# Altium PCB ADSR PCB.PcbDoc
Units mm, origin at the board's own origin, x right, y up, seen from the top; angles counter-clockwise.
Board outline 36 x 100 mm, 2 copper layers (Top Layer, Bottom Layer), stack 1.571 mm thick; 39 components, 30 nets, 107 pads, 18 vias.
Unrouted connection lines stored in the file: 1.
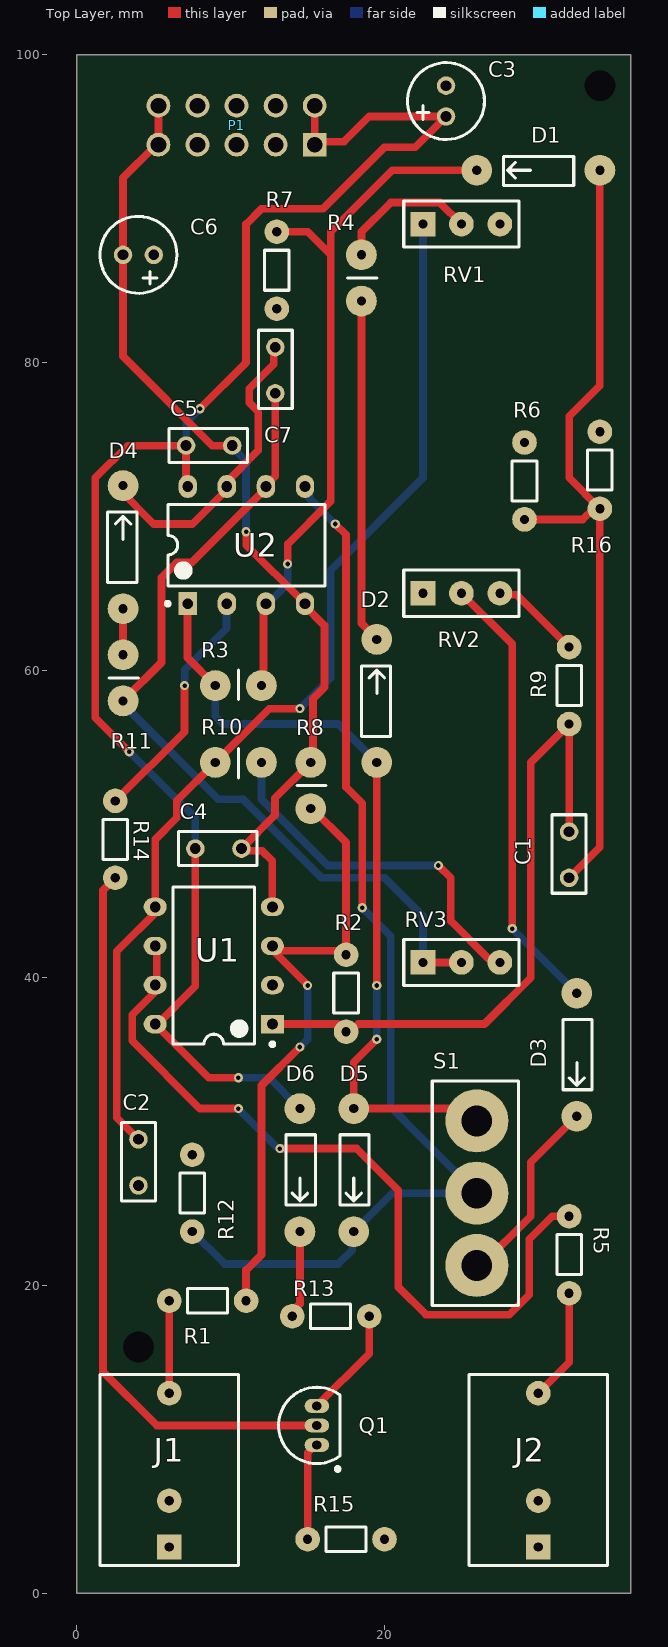
[diagram p0: Top Layer view]
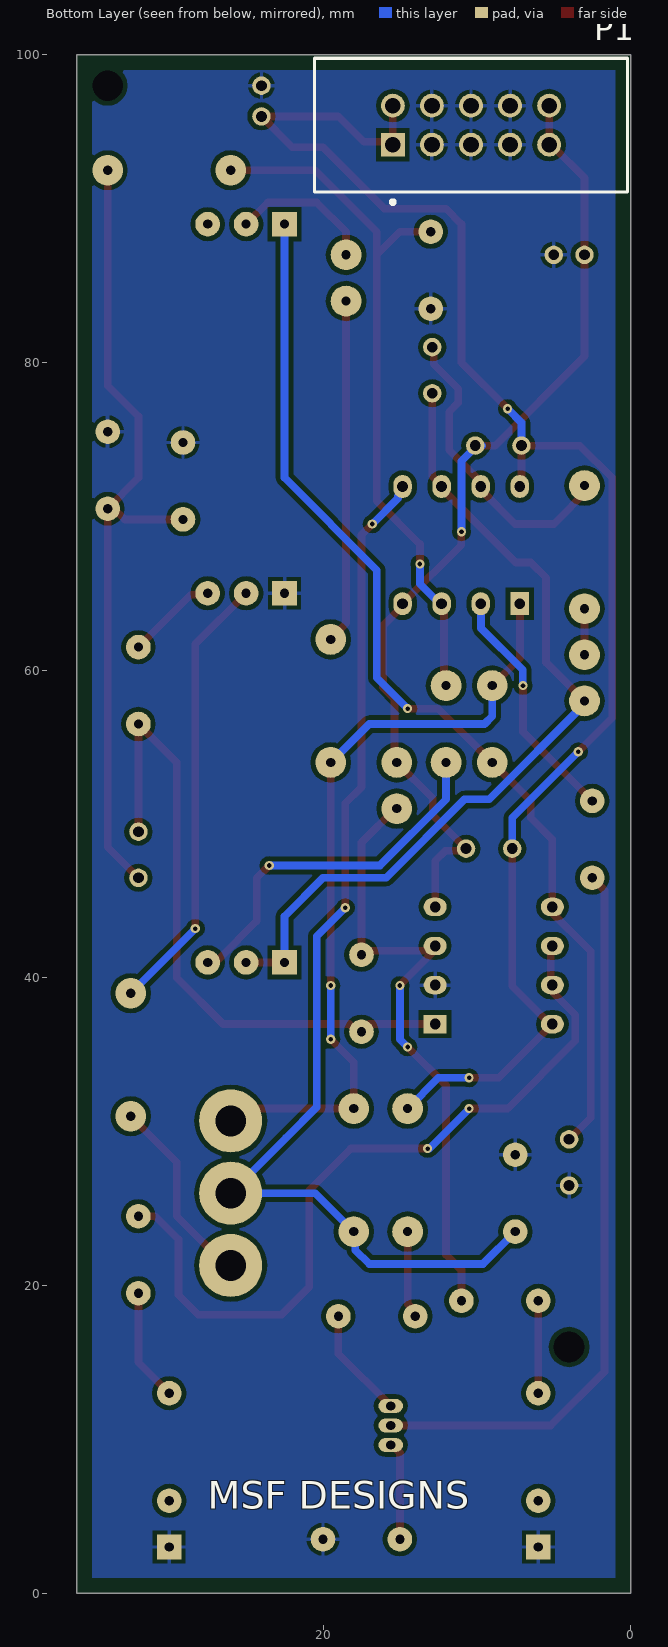
[diagram p1: Bottom Layer view, seen from below]

## Layer stack, top to bottom
Top Solder: solder mask 0.0102, Solder Resist, Dk 3.5
Top Layer: signal copper 0.0356
Dielectric 1: dielectric 1.5, FR-4, Dk 4.8
Bottom Layer: signal copper 0.0356
Bottom Solder: solder mask 0.0102, Solder Resist, Dk 3.5

## Board outline
0,100 36,100 36,0 0,0

## Design rules (kind name [scope] priority, off if disabled: settings)
Clearance [All] p1: gap=0.3 ignorepadtopadclearanceinfootprint=FALSE
PolygonConnect [All] p1: connectstyle=Relief reliefconductorwidth=0.254 reliefentries=4 polygonreliefangle="90 Angle" airgapwidth=0.254
RoutingVias [All] p1: holewidth=0.3 width=0.6 viastyle="Through Hole" minholewidth=0.3 minwidth=0.6 maxholewidth=0.3 maxwidth=0.6
SilkToSilkClearance [All] p1 off: silktosilkclearance=0.254
SilkToSolderMaskClearance [IsPad] p1: minsilkscreentomaskgap=0.1 clearancetoexposedcopper=TRUE
SolderMaskExpansion [All] p1: expansion=0.102 istentingtop=FALSE
Width [All] p1: maxlimit=1 minlimit=0.3 preferedwidth=0.5
28 further rules are at their usual default settings.

## Components (designator, comment, footprint, x,y, rotation, side; value= is the part's Value field where it differs from the comment)
C1 "Cap" CERAMIC_CAP 32,49.5 r270 top value=1n
C2 "Cap" CERAMIC_CAP 4,29.5 r270 top value=1u
C3 "Cap Pol1" ELECTROLYTIC_CAP 24,96 r90 top value=10u
C4 "Cap" CERAMIC_CAP 7.7,48.4 r0 top value=100n
C5 "Cap" CERAMIC_CAP 7.1,74.6 r0 top value=100n
C6 "Cap Pol1" ELECTROLYTIC_CAP 5,87 r180 top value=10u
C7 "Cap" CERAMIC_CAP 12.9,81 r270 top value=10n
D1 "Diode" DIODE 34,92.5 r180 top
D2 "4148" DIODE 19.5,54 r90 top
D3 "4148" DIODE 32.5,39 r270 top
D4 "4148" DIODE 3,64 r90 top
D5 "4148" DIODE 18,31.5 r270 top
D6 "LED" DIODE 14.5,31.5 r270 top
J1 "Mono Jack" MONO_JACK 6,3 r180 top
J2 "Mono Jack" MONO_JACK 30,3 r180 top
P1 "1-1634688-0" TECO-1-1634688-0-10_V 10.38,95.43 r180 top
Q1 "2N3904" TO-92A 15.6,10.9 r0 top
R1 "Res1" "RES_Axial 5mm" 6,19 r0 top value=10k
R2 "Res1" "RES_Axial 5mm" 17.5,41.5 r270 top value=1M
R3 "Res1" R_SMT 9,59 r0 top value=100K
R4 "Res1" R_SMT 18.5,87 r270 top value=1K
R5 "Res1" "RES_Axial 5mm" 32,24.5 r270 top value=1K
R6 "Res1" "RES_Axial 5mm" 29.1,69.8 r90 top value=1M
R7 "Res1" "RES_Axial 5mm" 13,83.5 r90 top value=220k
R8 "Res1" R_SMT 15.2,54 r270 top value=100k
R9 "Res1" "RES_Axial 5mm" 32,56.5 r90 top value=22K
R10 "Res1" R_SMT 12,54 r180 top value=1K
R11 "Res1" R_SMT 3,61 r270 top value=1K
R12 "Res1" "RES_Axial 5mm" 7.5,23.5 r90 top value=1M
R13 "Res1" "RES_Axial 5mm" 14,18 r0 top value=4.7K
R14 "Res1" "RES_Axial 5mm" 2.5,46.5 r90 top value=10K
R15 "Res1" "RES_Axial 5mm" 15,3.5 r0 top value=2.2K
R16 "Res1" "RES_Axial 5mm" 34,70.5 r90 top value=1M
RV1 "RPot" POT 22.5,89 r90 top value=1M
RV2 "RPot" POT 22.5,65 r90 top value=100k
RV3 "RPot" POT 22.5,41 r90 top value=1M
S1 "SW-SPDT" SWITCH 26,26 r180 top
U1 "TL072ACP" P0008A 8.9,40.8 r180 top
U2 "TL072ACP" P0008A 11.019,68.131 r90 top

## Footprints (in the part's own frame and the unit in brackets; to place one, negate y for a bottom-side part, rotate by r counter-clockwise, add the part's x,y. Pads: shape width x height; smd on the part's side, far side on the other; paste and mask are expansions set on the pad)
CERAMIC_CAP [mm]
  round 1.2 hole 0.7: 1(0,0) 2(3,0)
  silkscreen extent -1.1,-1.1 4,1.1
DIODE [mm]
  round 2 hole 0.6: 1(0,0) 2(8,0)
  silkscreen extent 1.7,-0.9 6.28,1
ELECTROLYTIC_CAP [mm]
  round 1.2 hole 0.7: 1(0,0) 2(2,0)
  silkscreen extent -1.5,-2.5 3.5,2.5
MONO_JACK [mm]
  rect 1.6x1.6 hole 0.6: 1(0,0)
  round 1.6 hole 0.6: 2(0,-3) 3(0,-10)
  silkscreen extent -4.5,-11.2 4.5,1.2
P0008A [mm] "DIP, 8-Leads, Body 10.15x6.6mm, Pitch 2.54mm"
  rect 1.5x1.2 hole 0.7: 1(-3.81,3.81)
  oval 1.5x1.2 hole 0.7: 2(-3.81,1.27) 3(-3.81,-1.27) 4(-3.81,-3.81) 5(3.81,-3.81) 6(3.81,-1.27) 7(3.81,1.27) 8(3.81,3.81)
  silkscreen extent -3.94,-5.1 2.65,5.23, body extent -3.95,-5.07 3.95,5.07, height 5.08
POT [mm]
  rect 1.6x1.6 hole 0.6: 1(0,0)
  round 1.6 hole 0.6: 2(0,-5) 3(0,-2.5)
  silkscreen extent -1.5,-6.25 1.5,1.25
R_SMT [mm]
  round 2 hole 0.6: 1(0,0) 2(3,0)
  silkscreen extent 1.5,-0.9 1.5,1
"RES_Axial 5mm" [mm]
  round 1.6 hole 0.6: 1(0,0) 2(5,0)
  silkscreen extent 1.2,-0.8 3.8,0.8
SWITCH [mm]
  round 4.1 / inner round 4 / far side round 4.1 hole 2: 1(0,4.7) 2(0,0) 3(0,-4.7)
  silkscreen extent -2.7,-7.3 2.9,7.3
TECO-1-1634688-0-10_V [mm] "10-Pin Connector, Body 20.35x8.7mm, Pitch 2.54mm"
  rect 1.55x1.55 hole 1.02: 1(-5.08,1.27)
  round 1.55 hole 1.02: 2(-5.08,-1.27) 3(-2.54,1.27) 4(-2.54,-1.27) 5(0,1.27) 6(0,-1.27) 7(2.54,1.27) 8(2.54,-1.27) 9(5.08,1.27) 10(5.08,-1.27)
  body extent -10.17,-4.65 10.18,4.35, height 9
TO-92A [mm] "TO, Flat Index; 3 In-Line, Axial Leads; Body Dia. 4.5mm; Leads 0.51 x 0.48 mm (max)"
  oval 1.6x0.9 hole 0.6: 1(0,-1.27) 2(0,0) 3(0,1.27)
  silkscreen extent -2.48,-2.95 1.5,2.48, body extent -2.48,-2.5 1.5,2.5, height 6.86

## Part data
C1 C2 C4 C5 C7: "Capacitor", LatestRevisionDate=17-Jul-2002, LatestRevisionNote="Re-released for DXP Platform.", PackageDescription="Radial Cap, Thru-Hole; 2 Leads; 0.3 in Pin Spacing", PackageReference=RAD-0.3, Published=8-Jun-2000, Publisher="Altium Limited"
C3 C6: "Polarized Capacitor (Radial)", LatestRevisionDate=17-Jul-2002, LatestRevisionNote="Re-released for DXP Platform.", PackageDescription="Polarized Capacitor (Radial); 2 Leads", PackageReference=RB7.6-15, Published=8-Jun-2000, Publisher="Altium Limited"
D1: "Default Diode", Code_JEDEC=DO-214-AB, LatestRevisionDate=17-Jul-2002, LatestRevisionNote="Re-released for DXP Platform.", PackageDescription="DO-214-AB/SMC; 2 C-Bend Leads; Body 7.9 x 5.9 mm, inc. leads (LxW)", PackageReference=SMC, PackageVersion=Sep-1996, Published=8-Jun-2000, Publisher="Altium Limited"
D2 D3 D4 D5: library part Diode, "Default Diode", Code_JEDEC=DO-214-AB, LatestRevisionDate=17-Jul-2002, LatestRevisionNote="Re-released for DXP Platform.", PackageDescription="DO-214-AB/SMC; 2 C-Bend Leads; Body 7.9 x 5.9 mm, inc. leads (LxW)", PackageReference=SMC, PackageVersion=Sep-1996, Published=8-Jun-2000, Publisher="Altium Limited"
D6: library part LED0, "Typical INFRARED GaAs LED", LatestRevisionDate=08-Jul-2005, LatestRevisionNote="Mech Layer 1 removed.", PackageDescription="LED; 2 Leads", PackageReference=LED-0, Published=8-Jun-2000, Publisher="Altium Limited"
J1 J2: library part 4832.2211, "Phone Connectors Audio Socket 3.5MM 2P SCR", Case/Package=Metal, Current Rating=500mA, Manufacturer=Schurter, Max Operating Temperature=70°C, Max Voltage Rating (AC)=30V, Min Operating Temperature=-20°C, Package Quantity=500, Supplier Part Number 1=486-3418-ND, Body Material=Metal, Category="Audio / Video Connectors", ComponentLink1Description=https://datasheet.ciiva.com/25289/1580985-25289573.pdf?src-supplier=Newark, ComponentLink1URL=https://datasheet.ciiva.com/25289/1580985-25289573.pdf?src-supplier=Newark, ComponentLink2Description=https://datasheet.ciiva.com/12540/typ-4832-2211-58787-12540719.pdf?src-supplier=Mouser, ComponentLink2URL=https://datasheet.ciiva.com/12540/typ-4832-2211-58787-12540719.pdf?src-supplier=Mouser, ComponentLink3Description=https://datasheet.ciiva.com/1086/1580985-1086284.pdf?src-supplier=Element14, ComponentLink3URL=https://datasheet.ciiva.com/1086/1580985-1086284.pdf?src-supplier=Element14, Contact Plating=Silver, Depth=9mm, Diameter=3.5mm, Gender=Female, Length=10.5mm, Manufacturer Part Number=4832.2211, Material=Plastic, Max Current Rating=500mA, Mount="Through Hole,Panel", Number of Contacts=2, Number of Ports=1, Number of Terminals=3, Orientation=Straight, Packaging=Bulk, Pricing 1="1=1.50000, 50=1.38500, 100=1.13400, 500=0.94200, 1000=0.93840 (USD)", REACH SVHC="No SVHC", RoHS=Yes, Shielding=Shielded, Stock 1=363, Supplier 1=Digi-Key, Termination=Solder, Weight=0.077603oz
P1: library part CMP-2000-05854-1, "Male Header, Pitch 2.54 mm, 2 x 5 Postion, Height 9.15 mm, Tail Length 3.2 mm, -40 to 105 degC, RoHS, Bulk", Manufacturer="TE Connectivity", Package Description="10-Pin Connector, Body 20.35 x 8.7 mm, Pitch 2.54 mm", Package Version="Rev. C2, 02/2011", Contact Material=Brass, Contact Plating=GoldPlatedContacts, Contact Termination Type=ThroughHole, Datasheet URL=https://datasheet.ciiva.com/6831/eng-cd-1634688-c2-6831201.pdf, Datasheet Version="Rev. C2, 02/2011", Gender=Header, Manufacturer URL=http://www.te.com/, Mounting Technology=ThroughHole, No. of Contacts=10Contacts, No. of Positions=10, No. of Rows=2, Orientation=Straight, Package Reference=1-1634688-0, Package URL=https://datasheet.ciiva.com/6831/eng-cd-1634688-c2-6831201.pdf, PartNumber=1-1634688-0, Pitch=2.54mm, Pitch Spacing=2.54mm, Product Range=-, SVHC=ToBeAdvised
Q1: "NPN General Purpose Amplifier", ComponentLink1Description="Manufacturer Link", ComponentLink1URL=http://www.fairchildsemi.com/, ComponentLink2Description=Datasheet, ComponentLink2URL=http://www.fairchildsemi.com/ds/2N%2F2N3904.pdf, DatasheetVersion=1997, LatestRevisionDate=15-Jan-2003, LatestRevisionNote="PCB Footprint 'BCY-W3/D4.7' replaced", PackageDescription="TO, Flat Index; 3 In-Line, Axial Leads; Body Dia. 4.5mm; Leads 0.51 x 0.48 mm (max)", PackageReference=TO-92A, PackageVersion=Sep-1998, Published=8-Jun-2000, Publisher="Altium Limited"
R1 R2 R3 R4 R5 R6 R7 R8 R9 R10 R11 R12 R13 R14 R15 R16: "Resistor", LatestRevisionDate=17-Jul-2002, LatestRevisionNote="Re-released for DXP Platform.", PackageDescription="Axial Device, Thru-Hole; 2 Leads; 0.3 in Pin Spacing", PackageReference=AXIAL-0.3, Published=8-Jun-2000, Publisher="Altium Limited"
RV1 RV2 RV3: "Potentiometer", LatestRevisionDate=17-Jul-2002, LatestRevisionNote="Re-released for DXP Platform.", PackageDescription="Variable Resistor, Thru-Hole; 3 Leads", PackageReference=VR5, Published=8-Jun-2000, Publisher="Altium Limited", Set Position=0.5, Sim Note="Enter the Resistance value and the set point into parameter fields."
S1: "SPDT Subminiature Toggle Switch, Right Angle Mounting, Vertical Actuation", ComponentLink1Description="Manufacturer Link", ComponentLink1URL=http://www.apem.com, DatasheetVersion=05-Dec-2000, LatestRevisionDate=17-Dec-2003, LatestRevisionNote="Schematic revised, PCB Footprint replaced.", PackageDescription="Switch; 4 Leads", PackageReference=TL36WW15050, Published=24-Mar-1999, Publisher="Altium Limited"
U1 U2: library part CMP-0017-00929-2, "Low-Noise JFET-Input Operational Amplifier, 7 to 36 V, 0 to 70 degC, 8-pin DIP (P8), Pb-Free (RoHS)", Manufacturer="Texas Instruments", Rating=Catalog, Total Supply Voltage(Max)(+5V is 5, +/-5V is 10)=36, Total Supply Voltage(Min)(+5V is 5, +/-5V is 10)=7, CMRR(Min)(dB)=75, Code_JEDEC=MS-001, ComponentLink1Description="Manufacturer URL", ComponentLink1URL=http://www.ti.com/, ComponentLink2Description=Datasheet, ComponentLink2URL=http://www.ti.com/lit/ds/symlink/tl072a.pdf, ComponentLink3Description="Package Specification", ComponentLink3URL=http://www.ti.com/litv/pdf/mpdi001b, DatasheetVersion=SLOS080J, Eco-Plan="Pb-Free (RoHS)", GBW(Typ)(MHz)=3, IIB(Max)(pA)=200, Iq per channel(Max)(mA)=2.5, Mounting Technology="Through Hole", Number of Channels=2, Offset Drift(Typ)(uV/C)=18, PackageDescription="8-Pin Plastic In-Line, Body 9.59 x 6.35 mm, Pitch 2.54 mm", PackageReference=P0008A, PackageVersion="4040082/E, 04/2010", PartNumber=TL072ACP, Slew Rate(Typ)(V/us)=13, Sub Family="General Purpose Amplifier, High Supply Voltage Amplifier (>=30V)", Vio (25C)(Max)(mV)=6, Vn at 1kHz(Typ)(nV/rtHz)=18

## Free pads (board coordinates)
  round 0 hole 2 unplated: 2(34,98) 3(4,16)

## Via types
v1: diameter 0.6, hole 0.3, Top Layer to Bottom Layer, 18 vias

## Nets (pads, with @x,y where several pads share a name; then routed paths per layer and width w, separated by ;. In a path a pad name is that pad's centre, name@x,y a point inside that pad or via, vN(x,y) a via of type N, cw(c..) or ccw(c..) an arc to the next point about the centre after c; other vN are vias at no path point)
+12V: C3.1 C4.1 C5.1 D6.1 P1.1 P1.2 U1.8 U2.8 | length 104.3
  Top Layer w0.5: v1(3.4,54.7) 1.2,56.9 1.2,72.5 3.3,74.6 C5.1 7.095,74.595 U2.8@7.095,71.915 ; C4.1 7.7,39.45 5.24,36.99 U1.8 8.58,33.5 v1(10.5,33.5) ; v1(8,77) 11,80 11,89 12,90 16,90 20,94 22,94 C3.1 19,96 17.361,94.361 15.661,94.361 P1.1 P1.2
  Bottom Layer w0.5: v1(3.4,54.7) 7.7,50.4 C4.1 ; C5.1 7.1,76.1 v1(8,77) ; v1(10.5,33.5) 12.5,33.5 D6.1
"+12V IC1": 
"+12V IC2": 
-12V: C4.2 C5.2 C6.2 P1.9 P1.10 R8.1 U1.4 U2.4 | length 63.1
  Top Layer w0.5: C6.2@3,86.8 3,80.4 8.8,74.6 C5.2 ; C6.2 3,92 P1.9@5,94 ; P1.9 P1.10 ; v1(11,69) 11.019,68.981 11.019,68.131 14.71,64.44 U2.4@14.71,64.29 ; U1.4 12.7,44.62 12.7,47.6 12.034,48.266 10.834,48.266 C4.2 12.873,50.573 12.873,51.673 R8.1 15.35,54.15 15.35,58.153 16.1,58.903 16.1,62.9 14.754,64.246 14.754,64.321 U2.4
  Bottom Layer w0.5: C5.2@9.648,74.6 C5.2 10.1,74.491 11,73.591 v1(11,69)
"-12V IC1": 
"-12V IC2": 
GND: C2.2 C3.2 C6.1 J1.1 J2.1 P1.3 P1.4 P1.5 P1.6 P1.7 P1.8 R6.2 R7.1 R12.2 R15.2 R16.2 RV2.1 U1.2 | length 1.3
  Top Layer w0.5: J1.1 J1.1@6.057,2.943 ; J2.1@29.5,2.5 J2.1
  Bottom Layer w0.5: U1.2@12.81,39.23 13.001,39.421 U1.2@13.001,39.692
NetC1_1: C1.1 R2.2 R9.1 U1.1 | length 42.4
  Top Layer w0.5: U1.1 12.72,37 17,37 R2.2 ; R2.2@18.008,36.71 18.298,37 26.5,37 29.5,40 29.5,54 R9.1 C1.1
NetC1_2: C1.2 D1.1 R6.1 R16.1 | length 53.7
  Top Layer w0.5: R6.1 32.894,69.8 33.594,70.5 R16.1 ; C1.2 34,48.5 R16.1 ; D1.1 34,78.5 32,76.5 32,72.5 R16.1
NetC2_1: C2.1 R10.2 RV1.1 U1.5 | length 69.4
  Top Layer w0.5: C2.1 2.6,30.9 2.6,41.72 U1.5@5.29,44.41 ; U1.5 5.09,48.99 6.5,50.4 6.5,51.5 R10.2 12.5,57.5 v1(14.5,57.5)
  Bottom Layer w0.5: v1(14.5,57.5) 16.5,59.5 16.5,66.5 22.5,72.5 RV1.1
NetC7_1: C7.1 D4.2 U2.7 | length 19.9
  Top Layer w0.5: D4.2@2.75,71.75 5,69.5 7.5,69.5 9.73,71.73 U2.7@9.73,71.81 ; U2.7@9.63,71.91 9.63,72.13 11.8,74.3 11.8,76.8 11.2,77.4 11.2,78.3 12.8,79.9 12.8,80.9 C7.1
NetC7_2: C7.2 R11.2 RV3.1 RV3.3 U2.6 | length 55.6
  Top Layer w0.5: R11.2 5.5,60.5 5.5,66 6.5,67 7.46,67 12.27,71.81 12.27,71.973 12.9,72.603 C7.2 ; RV3.1 RV3.3
  Bottom Layer w0.5: R11.2 3,57.8 9.2,51.6 10.8,51.6 15.9,46.5 20,46.5 22.5,44 RV3.1
NetD1_2: D1.2 R3.2 R7.2 U2.3 | length 46.6
  Top Layer w0.5: R3.2 12.135,59.135 12.135,64.055 U2.3@12.27,64.19 ; R7.2 15,88.5 16.5,87 ; v1(13.7,66.9) 13.7,68.2 16.5,71 16.5,87 ; D1.2 20.5,92.5 16.5,88.5 16.5,87
  Bottom Layer w0.5: U2.3@12.27,64.19 13.7,65.62 v1(13.7,66.9)
NetD2_1: D2.1 D5.1 R3.1 S1.3 U2.1 | length 50.5
  Top Layer w0.5: U2.1@7.19,64.19 7.19,60.81 R3.1 ; v1(19.5,36) 18,34.5 v1(18,31.5) 25.2,31.5 S1.3@25.4,31.7 ; v1(19.5,39.5) D2.1
  Bottom Layer w0.5: R3.1@9.119,58.881 R3.1 9,57 9.5,56.5 17,56.5 D2.1 ; v1(19.5,36) v1(19.5,39.5)
NetD2_2: D2.2 R4.2 | length 22.4
  Top Layer w0.5: R4.2@18.5,84.023 18.5,63.043 19.5,62.043 D2.2
NetD3_1: D3.1 RV2.3 | length 29.1
  Top Layer w0.5: RV2.3 28.3,61.7 v1(28.3,43.2)
  Bottom Layer w0.5: v1(28.3,43.2) D3.1
NetD3_2: D3.2 S1.1 | length 12.6
  Top Layer w0.5: S1.1 26.3,21.3 29.5,24.5 29.5,28 D3.2
NetD4_1: D4.1 R11.1 | length 3
  Top Layer w0.5: R11.1 D4.1
NetD6_2: D6.2 R13.1 | length 5.6
  Top Layer w0.5: R13.1@14.5,18.125 14.21,18.415 14.21,18.508 14.5,18.798 D6.2
NetJ1_3: J1.3 R1.1 | length 6
  Top Layer w0.5: J1.3 R1.1
NetJ2_3: J2.3 R5.2 | length 7.3
  Top Layer w0.5: J2.3 32,15 R5.2
NetQ1_1: Q1.1 R15.1 | length 6.5
  Top Layer w0.5: R15.1 15,9.112 15.173,9.285 15.173,9.445 15.358,9.63 Q1.1
NetQ1_2: Q1.2 R14.1 | length 47.8
  Top Layer w0.5: R14.1 1.7,45.7 1.7,14.4 5.2,10.9 Q1.2
NetQ1_3: Q1.3 R13.2 | length 7.2
  Top Layer w0.5: Q1.3 19,15.57 R13.2
NetR1_2: R1.2 R2.1 R8.2 U1.3 | length 40.7
  Top Layer w0.5: R1.2 11,21 12,22 12,33 v1(14.5,35.5) ; R8.2@14.6,51.4 R8.2@14.6,51.5 ; v1(15,39.5) 15,39.527 12.81,41.717 12.81,41.77 17.23,41.77 R2.1 17.5,48.8 15.3,51 R8.2
  Bottom Layer w0.5: v1(14.5,35.5) 15,36 v1(15,39.5)
NetR4_1: R4.1 RV1.2 RV1.3 | length 9.4
  Top Layer w0.5: R4.1 18.5,88.5 20.4,90.4 23.6,90.4 RV1.3@25.018,88.982
NetR5_1: R5.1 U1.6 U1.7 | length 50.8
  Top Layer w0.5: U1.6@5.19,41.77 5.19,39.19 3.6,37.6 3.6,35.9 8,31.5 v1(10.5,31.5) ; v1(13.2,28.9) 18.2,28.9 20.9,26.2 20.9,19.9 22.7,18.1 28.1,18.1 29.4,19.4 29.4,23 30.9,24.5 R5.1
  Bottom Layer w0.5: v1(10.5,31.5) 13.1,28.9 v1(13.2,28.9)
NetR9_2: R9.2 RV2.2 | length 5.9
  Top Layer w0.5: RV2.2 27.596,64.904 28.596,64.904 R9.2
NetR10_1: R10.1 RV3.2 | length 23.9
  Top Layer w0.5: v1(23.5,47.3) 24.3,46.5 24.3,43.7 26.79,41.21 27.29,41.21 RV3.2
  Bottom Layer w0.5: R10.1 12,51.6 16.3,47.3 v1(23.5,47.3)
NetR14_2: R14.2 U2.2 | length 16
  Top Layer w0.5: R14.2 7,56 v1(7,59) ; U2.2@9.558,64.13 U2.2
  Bottom Layer w0.5: v1(7,59) 7.019,59.019 7.019,60.019 9.73,62.73 U2.2@9.73,64.19
pads on no net: D5.2 J1.2 J2.2 R12.1 S1.2 U2.5
copper on no net: | length 72.5
  Top Layer w0.5: v1(16.8,69.5) 17.5,68.8 17.5,52.4 18.55,51.35 v1(18.55,44.55)
  Bottom Layer w0.5: 7.5,23.5 9.6,21.4 17,21.4 17.9,22.3 17.9,23.4 18,23.5 20.5,26 26,26 22.4,29.6 20.4,31.6 20.4,42.7 v1(18.55,44.55) ; 14.829,71.941 14.829,71.601 15.124,71.307 15.124,71.176 v1(16.8,69.5)

## Polygon pours and split planes (outlines as drawn)
GND on Bottom Layer "GND_L02_P013" (solid, remove dead copper, pour order 13): 1,1 35,1 35,99 1,99
GND on Bottom Layer "GND_L02_P011" (solid, remove dead copper, pour order 11): -6,97
no net on Bottom Layer "NONET_L02_P007" (solid, pour order 7): -6,89
GND on Bottom Layer "GND_L02_P005" (solid, pour order 5): 2.65,6.625
GND on Bottom Layer "GND_L02_P000" (solid, pour order 0): -34.7,6.4
no net on Top Layer "NONET_L01_P012" (solid, remove dead copper, pour order 12): 1,1

## Silkscreen, mask and mechanical layers (free items; w line width, h text height)
Bottom Overlay:
  text "MSF DESIGNS" at 27.5,5.5 h1.8
Mechanical 1:
  the board outline again, w0.254

## Text inside footprints (layer, text, board x,y; h text height)
C3: Top Overlay "+" at 24.737,104.132 h1.5 r90
C6: Top Overlay "+" at -3.132,87.737 h1.5 r180